# EAGLE board 2_bords_12_light (EAGLE 8.5.1)
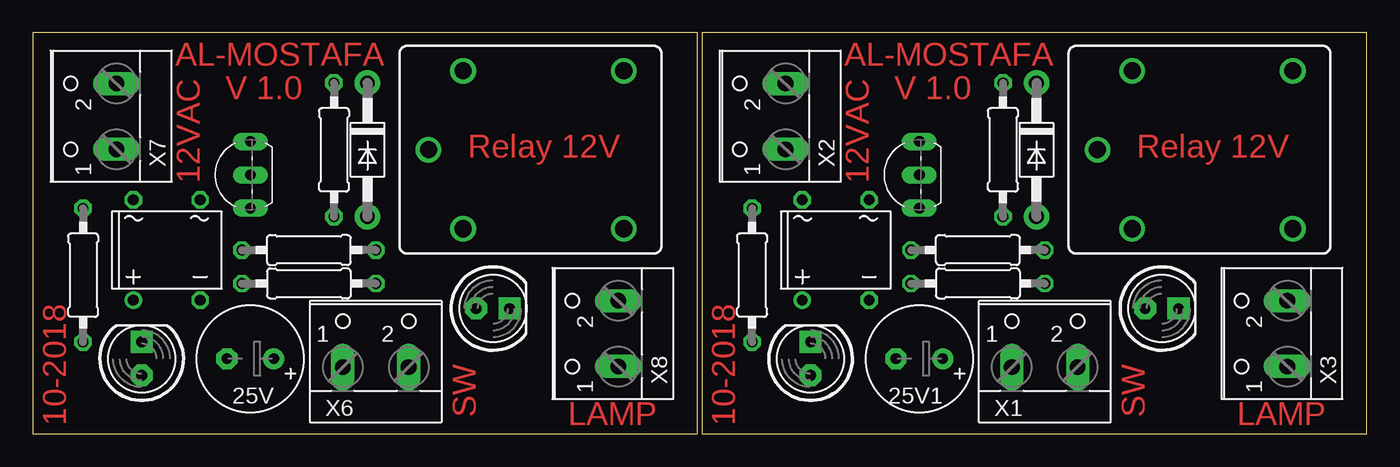
[diagram p0: board, top side]
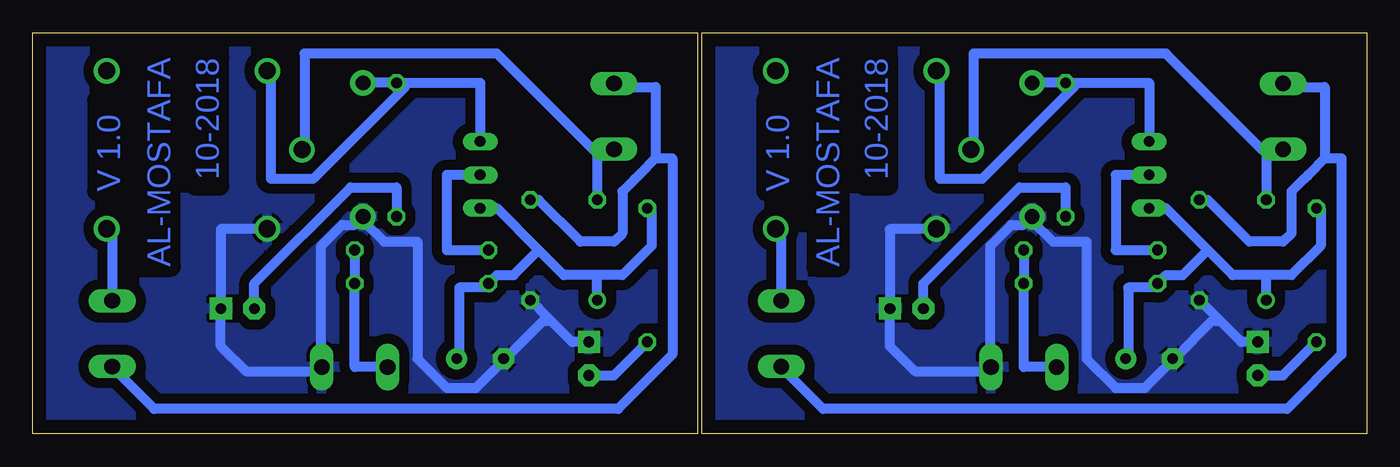
[diagram p1: board, bottom side, seen from below]

Size 101.27 x 30.47 mm. Coordinates in mm from the lower left corner, seen from the top.
Outline: 0,0 50.47,0 50.47,30.47 0,30.47 0,0
Outline: 50.8,0 101.27,0 101.27,30.47 50.8,30.47 50.8,0
Copper layers (1*16): Top 0.035mm / dielectric 1.5mm / Bottom 0.035mm
Design rules "default *": minimum track width 6mil, minimum drill 0.35mm, track to track 30mil, track to pad 30mil, pad to pad 6mil, via to via 6mil, smd to smd 6mil, copper to edge 40mil, drill to drill 6mil, minimum pad ring 10mil, minimum via ring 8mil, stop-mask expansion 4mil, vias tented up to drill 0mil, thermal gap 10mil

## Footprints (pad centres in the part's own frame; a part is rotated, then mirrored left to right if it is on the bottom)
E3,5-8 = drill 0.813 pad 1.6: + -1.778,0 | drill 0.813 pad 1.6 octagon: - 1.778,0
DB = drill 0.813: + -2.54,-3.81 | drill 0.813 octagon: - 2.54,-3.81; AC1 2.54,3.81; AC2 -2.54,3.81
DO41-10 = drill 1.118 pad 1.93: A 5.08,0; C -5.08,0
JS-M = drill 1.3: 1 6.7,6; 2 6.7,-6; C 9.335,0; NC -5.5,-6; NO -5.5,6
LED5MM = drill 0.813 pad 1.676 octagon: A -1.27,0 | drill 0.813 pad 1.676 square: K 1.27,0
0207/10 = drill 0.813 octagon: 1 -5.08,0; 2 5.08,0
TO92-EBC = drill 0.813 long: B 0,-1.27; C 2.54,-1.27; E -2.54,-1.27
W237-102 = drill 1.194 long: 1 -2.5,-1.27; 2 2.5,-1.27

## Placement (x,y rotation side)
25V  100uF  [E3,5-8]  16.51,5.71 180 top
25V1  100uF  [E3,5-8]  67.31,5.71 180 top
B1  DBDB101G  [DB]  10.16,13.97 0 top
B2  DBDB101G  [DB]  60.96,13.97 0 top
D1  1N5817  [DO41-10]  25.4,21.59 270 top
D2  1N5817  [DO41-10]  76.2,21.59 270 top
K1  JS-M1-24V-5  [JS-M]  90.17,21.59 180 top
K3  JS-M1-24V-5  [JS-M]  39.37,21.59 180 top
LD1  [LED5MM]  85.72,9.53 0 top
LD2  [LED5MM]  34.92,9.53 0 top
LD3  [LED5MM]  59.05,5.71 90 top
LD4  [LED5MM]  8.26,5.71 90 top
R1  2.2k  [0207/10]  20.95,13.97 0 top
R2  10K  [0207/10]  20.95,11.43 180 top
R3  2.2k  [0207/10]  71.75,13.97 0 top
R4  10K  [0207/10]  71.75,11.43 180 top
R5  10k  [0207/10]  73.66,21.59 90 top
R6  10k  [0207/10]  22.86,21.59 90 top
R7  10k  [0207/10]  3.81,12.06 90 top
R8  10k  [0207/10]  54.61,12.06 90 top
T1  2N5401  [TO92-EBC]  66.04,19.68 90 top
T3  2N5401  [TO92-EBC]  15.24,19.68 90 top
X1  [W237-102]  76.83,6.35 0 top
X2  [W237-102]  55.88,24.13 90 top
X3  [W237-102]  93.98,7.62 90 top
X6  [W237-102]  26.04,6.35 0 top
X7  [W237-102]  5.08,24.13 90 top
X8  [W237-102]  43.18,7.62 90 top

## Library data of the parts
25V 25V1 = rcl; SPICEPREFIX: C
B1 B2 = rectifier
D1 D2 = adafruit
K1 K3 = relay; MF: FARNELL; MPN: JSM1-12V-5; OC_FARNELL: 910351; OC_NEWARK: 14J1764
LD1-LD4 = led
R1-R8 = rcl-2
T1 T3 = transistor-neu-to92
X1-X3 X6-X8 = con-wago-500

## Nets
12VDC_IN: 25V.+ B1.+ R2.2 R7.2 T3.E
12VDC_IN1: 25V1.+ B2.+ R4.2 R8.2 T1.E
AC1-1: B2.AC2 K1.C X2.1
AC1-12: B1.AC2 K3.C X7.1
AC2-1: B2.AC1 X2.2 X3.1
AC2-12: B1.AC1 X7.2 X8.1
GND: 25V.- B1.- D1.A K3.1 LD2.K LD4.K X6.2
GND1: 25V1.- B2.- D2.A K1.1 LD1.K LD3.K X1.2
N$1: R3.1 T1.B
N$2: LD1.A R5.1
N$3: LD3.A R8.1
N$7: R1.1 T3.B
N$8: LD4.A R7.1
N$9: LD2.A R6.1
SUC: R1.2 R2.1 X6.1
SUC1: R3.2 R4.1 X1.1
SUC_RE: K3.NO X8.2
SUC_RE1: K1.NO X3.2
TR_OUT: D1.C K3.2 R6.2 T3.C
TR_OUT1: D2.C K1.2 R5.2 T1.C

## Tracks (layer width: path | path; a pad name or v marks a point on that pad's centre or on a via)
12VDC_IN
  Bottom 0.762: R7.2 3.49,17.14 3.49,14.29 5.71,12.06 7.62,12.06 | 25V.+ 18.1,5.71 18.1,11.11 15.88,11.11 R2.2 15.24,12.06 13.97,12.06 12.06,13.97 | B1.+ 7.62,12.06 | 12.06,13.97 10.16,12.06 7.62,12.06 | 12.06,13.97 15.24,17.14 T3.E
12VDC_IN1
  Bottom 0.762: R8.2 54.29,17.14 54.29,14.29 56.52,12.06 58.42,12.06 | 25V1.+ 68.9,5.71 68.9,11.11 66.67,11.11 R4.2 66.04,12.06 64.77,12.06 62.87,13.97 | B2.+ 58.42,12.06 | 62.87,13.97 60.96,12.06 58.42,12.06 | 62.87,13.97 66.04,17.14 T1.E
AC1-1
  Bottom 0.762: B2.AC2 58.42,21.59 57.15,21.59 X2.1 58.74,21.59 66.04,28.89 80.64,28.89 80.64,21.59 K1.C
AC1-12
  Bottom 0.762: B1.AC2 7.62,21.59 6.35,21.59 X7.1 7.94,21.59 15.24,28.89 29.84,28.89 29.84,21.59 K3.C
AC2-1
  Bottom 0.762: 53.98,20.95 55.24,19.68 55.56,19.37 56.52,18.41 56.52,15.24 57.15,14.61 59.69,14.61 62.87,17.78 B2.AC1 | 53.98,20.95 53.98,26.35 57.15,26.35 X2.2 | 53.98,20.95 52.7,20.95 52.7,6.03 56.83,1.91 92.08,1.91 95.25,5.08 X3.1
AC2-12
  Bottom 0.762: 3.17,20.95 4.45,19.68 4.76,19.37 5.71,18.41 5.71,15.24 6.35,14.61 8.89,14.61 12.06,17.78 B1.AC1 | 3.17,20.95 3.17,26.35 6.35,26.35 X7.2 | 3.17,20.95 1.91,20.95 1.91,6.03 6.03,1.91 41.27,1.91 44.45,5.08 X8.1
GND
  Bottom 0.762: 11.27,8.73 9.53,6.99 LD4.K | 11.27,8.73 B1.- | 11.27,8.73 11.43,8.57 11.75,8.57 14.61,5.71 25V.- 14.92,5.4 16.83,3.49 19.05,3.49 21.27,5.71 21.27,14.61 23.81,14.61 25.4,16.19 D1.A 26.04,15.88 26.99,15.88 28.57,14.29 28.57,5.4 X6.2 28.57,5.08 28.89,4.76 34.29,4.76 36.2,6.67 LD2.K 36.2,15.56 32.7,15.56 K3.1
  pour Bottom: 0.64,30.48 0,29.84 0,0 50.16,0 50.16,30.48
GND1
  Bottom 0.762: 62.07,8.73 60.33,6.99 LD3.K | 62.07,8.73 B2.- | 62.07,8.73 62.23,8.57 62.55,8.57 65.41,5.71 25V1.- 65.72,5.4 67.63,3.49 69.85,3.49 72.07,5.71 72.07,14.61 74.61,14.61 76.2,16.19 D2.A 76.83,15.88 77.79,15.88 79.38,14.29 79.38,5.4 X1.2 79.38,5.08 79.69,4.76 85.09,4.76 87,6.67 LD1.K 87,15.56 83.5,15.56 K1.1
  pour Bottom: 51.44,30.48 50.8,29.84 50.8,0 100.97,0 100.97,30.48
N$1
  Bottom 0.762: T1.B 69.85,19.68 69.85,13.97 R3.1
N$2
  Bottom 0.762: R5.1 73.66,18.73 77.15,18.73 84.45,11.43 LD1.A
N$3
  Bottom 0.762: R8.1 57.15,4.45 LD3.A
N$7
  Bottom 0.762: T3.B 19.05,19.68 19.05,13.97 R1.1
N$8
  Bottom 0.762: R7.1 6.35,4.45 LD4.A
N$9
  Bottom 0.762: R6.1 22.86,18.73 26.35,18.73 33.66,11.43 LD2.A
SUC
  Bottom 0.762: R1.2 R2.1 26.04,5.08 X6.1
SUC1
  Bottom 0.762: R3.2 R4.1 76.83,5.08 X1.1
SUC_RE
  Bottom 0.762: X8.2 44.45,15.56 44.77,15.56 K3.NO
SUC_RE1
  Bottom 0.762: X3.2 95.25,15.56 95.57,15.56 K1.NO
TR_OUT
  Bottom 0.762: T3.C 16.51,26.67 22.23,26.67 | 22.23,26.67 R6.2 D1.C | K3.2 32.38,27.3 32.38,19.37 29.21,19.37 22.23,26.35 22.23,26.67
TR_OUT1
  Bottom 0.762: T1.C 67.31,26.67 73.03,26.67 | 73.03,26.67 R5.2 D2.C | K1.2 83.19,27.3 83.19,19.37 80.01,19.37 73.03,26.35 73.03,26.67

## Text on the board
Top: AL-MOSTAFA | AL-MOSTAFA | V 1.0 | V 1.0 | Relay 12V | Relay 12V | 12VAC | 12VAC | 10-2018 | SW | LAMP | 10-2018 | SW | LAMP
Bottom: 10-2018 | 10-2018 | V 1.0 | V 1.0 | AL-MOSTAFA | AL-MOSTAFA